# Altium PCB PlacaCircuito.PcbDoc (part 2 of 2)
Units mm, origin at the board's own origin, x right, y up, seen from the top; angles counter-clockwise.
Board outline 210.01 x 194.46 mm, 2 copper layers (Top Layer, Bottom Layer); 53 components, 91 nets, 338 pads, 161 vias.
Unrouted connection lines stored in the file: 2.
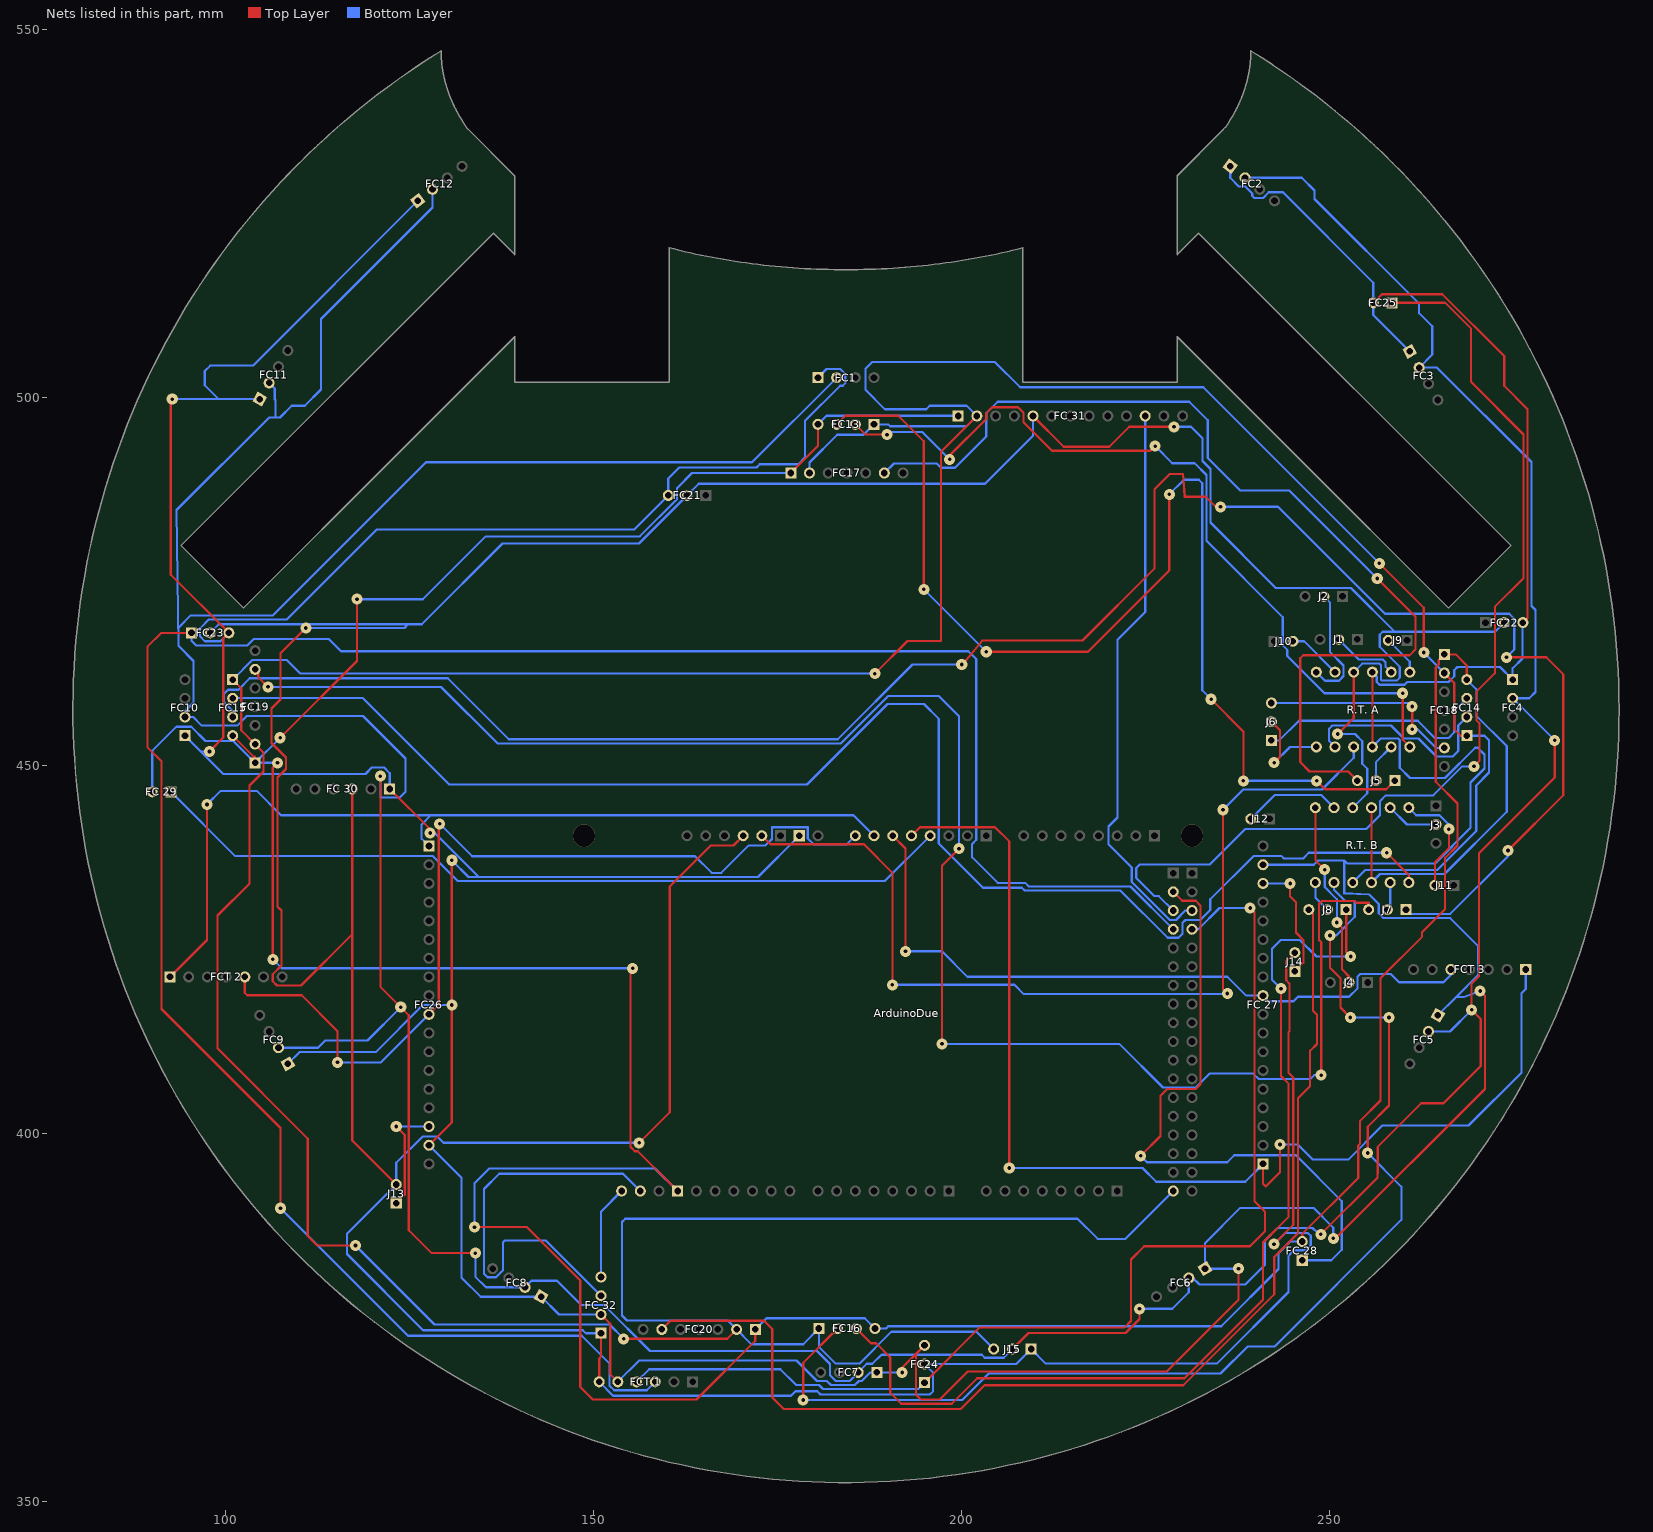
[diagram p2: the nets of this part, all layers, seen from the top]

## Via types
v1: diameter 1.5, hole 0.5, Top Layer to Bottom Layer, 157 vias
v2: diameter 3, hole 3, Top Layer to Bottom Layer, 4 vias

## Nets (pads, with @x,y where several pads share a name; then routed paths per layer and width w, separated by ;. In a path a pad name is that pad's centre, name@x,y a point inside that pad or via, vN(x,y) a via of type N, cw(c..) or ccw(c..) an arc to the next point about the centre after c; other vN are vias at no path point) (continued)
NetArduinoDue_48: "FCT 1.3" ArduinoDue.48 FC23.1 | length 321.8
  Top Layer w0.3: FC23.1@95.377,467.995 91.288,467.995 89.383,466.09 89.383,452.45 91.288,450.545 91.288,416.916 107.467,400.736 v1(107.467,389.839)
  Bottom Layer w0.3: FC23.1@95.377,467.995 95.377,466.928 96.037,466.268 102.946,466.268 103.835,467.157 114.021,467.157 115.672,465.506 200.889,465.506 201.955,464.439 201.955,439.874 201.411,439.329 201.411,437.515 204.891,434.035 208.614,434.035 209.107,433.542 222.921,433.542 ArduinoDue.48@228.727,427.736 ; v1(107.467,389.839) 124.79,372.516 148.387,372.516 152.135,368.768 152.135,365.76 152.781,365.114 157.215,365.114 158.369,366.268
NetArduinoDue_49: "FCT 1.4" ArduinoDue.49 FC24.1 | length 154.8
  Top Layer w0.3: FC24.1@194.945,366.141 202.463,373.659 222.123,373.659 222.987,374.523 222.987,382.88 224.79,384.683 239.166,384.683 241.198,386.715 241.198,389.357 239.751,390.804 239.751,430.047 v1(239.166,430.632)
  Bottom Layer w0.3: 155.829,366.268 157.537,367.976 175.355,367.976 177.501,365.83 180.613,365.83 181.167,365.276 194.08,365.276 FC24.1@194.945,366.141 ; ArduinoDue.49@231.267,427.736 232.105,427.736 235.001,430.632 v1(239.166,430.632)
NetArduinoDue_50: ArduinoDue.50 FC25.1 | length 138.7
  Top Layer w0.3: FC25.1@258.445,512.826 265.659,512.826 269.189,509.295 269.189,502.056 276.301,494.944 276.301,475.412 272.415,471.526 272.415,462.513 269.9,459.998 269.9,456.133 270.332,455.701 270.332,450.619 v1(269.573,449.859)
  Bottom Layer w0.3: ArduinoDue.50@228.727,430.276 226.769,432.234 226.169,432.234 223.698,434.705 223.698,436.053 224.169,436.524 233.68,436.524 238.506,441.35 254.94,441.35 256.819,443.23 256.819,445.135 257.607,445.922 264.061,445.922 267.998,449.859 v1(269.573,449.859)
NetArduinoDue_51: "FC 31.11" ArduinoDue.51 | length 77.5
  Bottom Layer w0.3: 224.917,497.459 224.917,470.814 221.158,467.055 221.158,442.925 219.939,441.706 219.939,439.282 223.088,436.132 223.088,434.158 228.24,429.006 229.089,429.006 230.359,430.276 ArduinoDue.51@231.267,430.276
NetArduinoDue_52: "FC 28.1" ArduinoDue.52 | length 87.3
  Top Layer w0.3: v1(224.307,396.951) 227,399.644 227,405.13 227.914,406.044 231.775,406.044 232.435,406.705 232.435,430.936 231.775,431.597 229.946,431.597 ArduinoDue.52@228.727,432.816
  Bottom Layer w0.3: v1(224.307,396.951) 225.171,396.088 236.068,396.088 237.007,397.027 245.389,397.027 251.623,390.793 251.623,384.211 250.19,382.778 246.253,382.778
NetArduinoDue_55: "FC 30.3" "FC 31.5" "FC 32.1" "FCT 1.6" "R.T. A.9" "R.T. B.9" ArduinoDue.55 FC21.2 FC22.2 FC23.2 FC24.2 J13.2 J14.2 J15.1 | length 696.4
  Top Layer w0.3: v1(110.913,468.655) 107.475,465.218 107.475,458.946 106.248,457.72 106.248,453.034 108.215,451.068 108.215,449.502 107.061,448.348 107.061,430.809 107.594,430.276 107.594,422.808 106.426,421.64 106.426,420.662 106.998,420.091 110.236,420.091 117.221,427.076 ; 117.221,446.786 117.221,427.076 ; J13.2@123.19,393.065 117.221,399.034 117.221,427.076 ; 150.749,366.268 150.749,369.443 151.003,369.697 151.003,372.872 ; v1(156.185,398.729) 160.325,402.869 160.325,433.553 165.887,439.115 168.986,439.115 ArduinoDue.55@170.307,440.436 ; 209.677,497.459 213.854,493.282 220.042,493.282 222.745,495.986 v1(228.829,495.986) ; v1(242.418,384.962) 245.034,387.579 245.034,407.594 244.373,408.254 244.373,413.741 244.526,413.893 244.526,420.345 244.069,420.802 244.069,423.393 J14.2@245.237,424.561 ; v1(251.054,454.254) 253.238,456.438 253.238,462.661
  Bottom Layer w0.3: FC23.2@97.917,467.995 99.085,469.163 124.816,469.163 ; v1(110.913,468.655) 124.308,468.655 124.816,469.163 ; 150.749,366.268 152.636,364.381 176.818,364.381 177.41,364.973 180.362,364.973 180.803,364.532 195.647,364.532 196.113,364.998 196.113,367.513 FC24.2@194.945,368.681 207.391,368.681 J15.1@209.423,370.713 211.404,368.732 234.645,368.732 244.373,378.46 244.373,383.388 245.11,384.124 246.721,384.124 247.407,384.81 247.407,386.094 247.015,386.486 243.942,386.486 v1(242.418,384.962) ; 151.003,372.872 148.946,372.872 148.539,373.278 126.822,373.278 116.484,383.616 116.484,386.359 J13.2@123.19,393.065 123.19,396.011 126.746,399.567 128.778,399.567 129.616,398.729 v1(156.185,398.729) ; 209.677,497.459 209.677,494.765 203.151,488.239 164.262,488.239 FC21.2@162.687,486.664 156.159,480.136 137.617,480.136 126.644,469.163 124.816,469.163 ; v1(228.829,495.986) 231.14,495.986 232.689,494.436 232.689,491.338 233.788,490.239 233.788,482.975 242.661,474.102 252.868,474.102 258.823,468.147 ; v1(251.054,454.254) 253.401,454.254 254.392,453.263 254.392,450.215 255.067,449.54 255.067,446.202 253.111,444.246 ; 253.238,462.661 254.392,463.815 256.743,463.815 256.946,463.612 256.946,461.62 257.059,461.507 259.08,461.507 259.486,461.913 259.486,463.372 256.769,466.09 256.769,467.741 257.175,468.147 258.823,468.147 ; FC22.2@273.685,469.392 272.44,468.147 258.823,468.147
  other v1: 148.717,440.436 231.267,440.436
  other v2: 148.717,440.436 231.267,440.436
NetArduinoDue_56: "R.T. A.3" ArduinoDue.56 | length 128.4
  Top Layer w0.3: ArduinoDue.56@172.847,440.436 174.015,439.268 186.715,439.268 190.576,435.407 v1(190.576,420.192) ; v1(235.483,443.967) 235.483,419.583 v1(236.068,418.998)
  Bottom Layer w0.3: v1(190.576,420.192) 207.162,420.192 208.432,418.922 235.991,418.922 v1(236.068,418.998) ; v1(235.483,443.967) 238.244,446.728 248.945,446.728 253.238,451.02 253.238,452.501
NetArduinoDue_58: "FC 27.17" "FC 30.1" "FC 32.2" "FCT 1.5" "R.T. A.2" "R.T. A.8" ArduinoDue.58 FC1.1 FC2.1 FC3.1 FC4.1 FC5.1 FC6.1 FC7.1 FC8.1 FC9.1 FC10.1 FC11.1 FC12.1 FC21.3 FC22.3 FC23.3 FC24.3 FC25.2 FC26.17 | length 869.8
  Top Layer w0.3: v1(92.761,499.745) 92.558,499.542 92.558,475.894 FC23.3@100.457,467.995 99.695,467.233 99.695,453.771 v1(97.815,451.891) ; 122.301,446.786 127.787,441.3 v1(127.787,440.817) ; FC26.17@127.635,398.399 130.734,401.498 v1(130.734,417.449) v1(130.734,437.109) ; 151.003,375.412 152.248,374.167 152.248,367.309 153.289,366.268 ; v1(191.897,367.538) 191.897,368.173 193.777,370.053 ; FC24.3@194.945,371.221 193.777,370.053 ; v1(237.591,381.635) 237.591,377.418 227.838,367.665 200.812,367.665 197.002,363.855 194.412,363.855 193.777,364.49 193.777,370.053 ; v1(250.469,385.75) 250.774,385.75 271.069,406.044 271.069,418.694 v1(270.408,419.354) ; 255.778,452.501 255.778,462.661 ; FC25.2@255.905,512.826 257.073,513.994 265.278,513.994 273.685,505.587 273.685,501.548 276.86,498.373 276.86,470.027 FC22.3@276.225,469.392
  Bottom Layer w0.3: v1(92.761,499.745) 99.06,499.745 ; FC10.1@94.488,454.025 96.622,451.891 ; v1(97.815,451.891) 96.622,451.891 ; FC23.3@100.457,467.995 99.303,466.841 97.191,466.841 96.545,467.487 96.545,468.63 97.733,469.818 108.3,469.818 120.523,482.041 155.524,482.041 FC21.3@160.147,486.664 160.147,488.95 161.646,490.449 172.11,490.449 172.568,490.906 177.8,490.906 178.714,491.82 178.714,496.799 183.49,501.574 183.832,501.574 184.175,501.917 184.175,503.174 183.515,503.834 181.635,503.834 FC1.1@180.467,502.666 ; FC11.1@104.648,499.745 99.06,499.745 ; FC9.1@108.458,409.448 110.058,411.048 120.397,411.048 126.798,417.449 v1(130.734,417.449) ; 122.301,446.786 122.301,448.945 121.552,449.694 119.877,449.694 119.001,448.818 99.695,448.818 96.622,451.891 ; FC12.1@126.111,526.669 103.734,504.292 97.917,504.292 97.18,503.555 97.18,501.625 99.06,499.745 ; FC26.17@127.635,398.399 132.055,393.979 132.055,380.416 134.645,377.825 FC8.1@142.875,377.825 145.288,375.412 151.003,375.412 ; v1(127.787,440.817) 128.422,440.817 134.398,434.842 ; v1(130.734,437.109) 133.001,434.842 134.398,434.842 ; 153.289,366.268 156.185,369.164 177.56,369.164 180.34,366.384 181.68,366.384 182.234,365.83 185.479,365.83 186.033,366.384 186.406,366.384 187.56,367.538 FC7.1@188.468,367.538 v1(191.897,367.538) ; ArduinoDue.58@177.927,440.436 172.333,434.842 134.398,434.842 ; FC2.1@236.474,531.368 236.474,529.793 237.642,528.625 238.506,528.625 239.446,527.685 239.446,527.355 239.725,527.075 240.944,527.075 241.706,527.837 243.637,527.837 255.905,515.569 FC25.2@255.905,512.826 255.905,511.175 FC3.1@260.858,506.222 ; v1(237.591,381.635) FC6.1@233.045,381.635 233.045,385.089 237.846,389.89 247.777,389.89 250.469,387.198 v1(250.469,385.75) ; 240.919,436.499 247.828,436.499 248.336,437.007 ; 255.778,452.501 256.932,453.655 259.283,453.655 259.486,453.452 259.486,449.682 260.888,448.28 265.635,448.28 269.754,452.399 270.089,452.399 271.004,451.485 271.004,449.58 269.101,447.677 269.101,441.507 264.271,436.677 252.349,436.677 251.943,437.083 ; 255.778,462.661 256.371,462.068 256.371,461.327 256.745,460.953 260.142,460.953 260.504,461.315 266.116,461.315 266.897,462.096 266.897,462.915 267.335,463.353 273.12,463.353 FC4.1@274.828,461.645 274.828,463.178 276.156,464.507 276.156,469.323 FC22.3@276.225,469.392 ; FC5.1@264.668,416.052 267.151,418.535 ; v1(270.408,419.354) 268.236,418.535 267.151,418.535 ; 248.336,437.007 251.943,437.083 ; 248.336,437.007 248.336,437.083 251.943,437.083 ; 251.943,437.083 251.943,432.613 255.361,432.445 256.642,431.165 256.642,429.895 257.288,429.249 266.344,429.249 270.154,425.439 270.154,421.538 267.151,418.535
NetArduinoDue_60: "FCT 2.5" ArduinoDue.60 FC26.10 | length 127.8
  Top Layer w0.3: 102.616,421.259 102.616,419.1 102.946,418.77 110.338,418.77 115.214,413.893 v1(115.214,409.651) ; FC26.10@127.635,416.179 128.956,417.5 128.956,441.935 v1(129.083,442.062)
  Bottom Layer w0.3: v1(115.214,409.651) 121.107,409.651 FC26.10@127.635,416.179 ; v1(129.083,442.062) 133.502,437.642 163.779,437.642 166.025,435.396 167.35,435.396 171.083,439.13 173.355,439.13 174.233,440.008 174.233,441.59 179.095,441.59 179.095,440.055 179.883,439.268 184.379,439.268 ArduinoDue.60@185.547,440.436
NetArduinoDue_61: "FCT 2.1" ArduinoDue.61 FC26.1 | length 124.5
  Top Layer w0.3: 92.456,421.259 97.485,426.288 v1(97.485,444.678)
  Bottom Layer w0.3: v1(97.485,444.678) 99.339,446.532 104.242,446.532 107.544,443.23 127.892,443.23 ; FC26.1@127.635,439.039 126.633,440.041 126.633,441.971 127.892,443.23 ; ArduinoDue.61@188.087,440.436 185.293,443.23 127.892,443.23
NetArduinoDue_62: "FC 27.10" "FCT 3.5" ArduinoDue.62 | length 97.4
  Top Layer w0.3: ArduinoDue.62@190.627,440.436 192.354,438.709 v1(192.354,424.739)
  Bottom Layer w0.3: v1(192.354,424.739) 197.307,424.739 200.762,421.284 236.079,421.284 238.645,418.719 240.919,418.719 241.687,417.951 245.065,417.951 245.674,418.559 252.595,418.559 253.771,419.735 253.771,421.322 254.114,421.665 258.267,421.665 259.385,420.548 265.43,420.548 266.446,421.564 266.446,422.275
NetArduinoDue_63: "FC 27.1" "FCT 3.1" ArduinoDue.63 | length 157.7
  Top Layer w0.3: ArduinoDue.63@193.167,440.436 194.335,441.604 204.521,441.604 206.451,439.674 v1(206.451,395.3) ; 240.919,395.859 240.919,393.167 241.3,392.786 243.23,394.716 v1(243.23,398.501)
  Bottom Layer w0.3: v1(206.451,395.3) 224.561,395.3 226.416,393.446 238.506,393.446 240.919,395.859 ; v1(243.23,398.501) 245.643,398.501 247.701,396.443 252.501,396.443 257.124,401.066 268.834,401.066 276.022,408.254 276.022,419.049 276.606,419.633 276.606,422.275
NetArduinoDue_64: "FC 29.1" ArduinoDue.64 | length 110.7
  Bottom Layer w0.3: 92.583,446.405 101.321,437.667 128.168,437.667 131.548,434.288 189.559,434.288 ArduinoDue.64@195.707,440.436
NetArduinoDue_76: "FC 28.2" "FC 29.2" "FC 31.1" "R.T. B.2" "R.T. B.8" ArduinoDue.76 FC13.4 FC14.4 FC15.4 FC16.4 FC17.1 FC18.1 FC19.1 FC20.1 | length 590.2
  Top Layer w0.3: FC15.4@100.965,454.025 103.835,451.155 104.013,451.155 FC19.1@104.013,450.342 ; v1(106.426,423.647) 106.426,449.707 v1(107.061,450.342) ; v1(107.417,453.746) 117.856,464.185 v1(117.856,472.567) ; v1(133.807,387.274) 140.945,387.274 148.184,380.035 148.184,365.557 149.885,363.855 163.982,363.855 171.958,371.831 FC20.1@171.958,373.38 ; v1(155.296,422.427) 155.016,422.148 155.016,398.145 155.575,397.586 156.007,397.586 ArduinoDue.76@161.417,392.176 ; FC17.1@176.784,489.712 180.467,493.395 FC13.4@180.467,496.316 ; 246.253,385.318 246.253,386.359 253.848,393.954 253.848,398.348 254.076,398.577 254.076,401.661 256.885,404.47 256.885,421.07 262.534,426.72 262.534,427.355 265.659,430.479 265.659,437.443 267.335,439.119 267.335,444.805 264.389,447.751 264.389,463.296 264.795,463.702 264.795,464.312 FC18.1@265.557,465.074 267.081,465.074 268.605,463.55 FC14.4@268.605,461.645 ; 255.651,434.086 255.651,444.246
  Bottom Layer w0.3: 90.043,446.405 90.043,451.968 93.32,455.244 95.352,455.244 97.282,453.313 101.042,453.313 FC19.1@104.013,450.342 ; v1(106.426,423.647) 107.645,422.427 v1(155.296,422.427) ; v1(107.061,450.342) FC19.1@104.013,450.342 ; v1(107.417,453.746) FC19.1@104.013,450.342 ; v1(117.856,472.567) 126.797,472.567 135.331,481.101 156.261,481.101 161.341,486.181 161.341,487.68 163.373,489.712 FC17.1@176.784,489.712 ; v1(133.807,387.274) 133.807,393.217 135.839,395.249 158.344,395.249 ArduinoDue.76@161.417,392.176 ; FC20.1@171.958,373.38 173.482,374.904 186.817,374.904 FC16.4@188.214,373.507 189.713,373.507 190.017,373.812 235.255,373.812 243.027,381.584 243.027,383.769 244.577,385.318 246.253,385.318 ; FC13.4@180.467,496.316 181.635,497.484 199.517,497.484 199.517,497.459 ; 255.651,434.086 256.805,435.24 265.568,435.24 274.015,443.687 274.015,452.628 269.9,456.743 269.9,460.35 FC14.4@268.605,461.645
NetArduinoDue_81: "FC 31.2" "R.T. B.3" ArduinoDue.81 FC13.1 FC14.1 FC15.1 FC16.1 FC17.2 FC18.2 FC19.2 FC20.2 J15.3 | length 626
  Top Layer w0.3: FC15.1@100.965,461.645 102.133,460.477 102.133,454.762 FC19.2@104.013,452.882 105.167,451.728 105.167,449.174 103.251,447.258 103.251,433.934 98.908,429.59 98.908,411.556 111.176,399.288 111.176,386.08 112.471,384.785 v1(117.653,384.785) ; v1(154.076,372.11) 168.148,372.11 FC20.2@169.418,373.38 ; v1(188.189,462.458) 192.634,466.903 197.187,466.903 197.187,492.589 202.057,497.459 ; v1(256.718,477.444) 262.763,471.399 v1(262.763,465.328) ; FC18.2@265.557,462.534 266.897,461.194 266.897,454.899 267.771,454.025 FC14.1@268.605,454.025
  Bottom Layer w0.3: FC15.1@100.965,461.645 103.632,464.312 108.331,464.312 110.185,462.458 v1(188.189,462.458) ; v1(117.653,384.785) 128.397,374.04 152.146,374.04 v1(154.076,372.11) ; FC17.2@179.324,489.712 179.324,491.134 183.083,494.894 186.665,494.894 FC13.1@188.087,496.316 190.017,496.316 190.271,496.062 200.66,496.062 202.057,497.459 200.66,498.856 195.656,498.856 195.174,498.373 189.56,498.373 186.919,501.015 186.919,503.86 187.858,504.8 204.495,504.8 207.942,501.353 232.808,501.353 v1(256.718,477.444) ; J15.3@204.343,370.713 202.006,373.05 190.439,373.05 186.121,368.732 182.88,368.732 180.594,371.018 FC16.1@180.594,373.507 178.46,371.373 171.425,371.373 FC20.2@169.418,373.38 168.199,374.599 154.534,374.599 153.848,375.285 153.848,387.985 154.28,388.417 215.729,388.417 218.464,385.682 222.233,385.682 ArduinoDue.81@228.727,392.176 ; 253.111,434.086 254.819,435.794 264.598,435.794 269.876,441.072 269.876,447.269 271.628,449.021 271.628,453.39 270.993,454.025 FC14.1@268.605,454.025 ; v1(262.763,465.328) FC18.2@265.557,462.534
NetArduinoDue_82: "FC 32.3" ArduinoDue.82 | length 58.1
  Bottom Layer w0.3: 151.003,377.952 143.51,385.445 137.922,385.445 137.668,385.191 137.668,381.395 136.74,380.467 135.572,380.467 135.103,380.936 135.103,392.455 137.16,394.513 154,394.513 ArduinoDue.82@156.337,392.176
NetArduinoDue_83: "FC 32.4" ArduinoDue.83 | length 12.8
  Bottom Layer w0.3: 151.003,380.492 151.003,389.382 ArduinoDue.83@153.797,392.176
NetFC1_2: FC1.2 FC2.2 FC3.2 FC4.2 FC5.2 FC6.2 FC7.2 FC8.2 FC9.2 FC10.2 FC11.2 FC12.2 J15.2 | length 672.2
  Top Layer w0.3: v1(121.031,448.539) 121.031,419.913 v1(123.8,417.144) 124.898,416.046 124.898,386.861 128.016,383.743 v1(133.934,383.743) ; J15.2@206.883,370.713 209.067,372.897 222.25,372.897 224.155,374.802 v1(224.155,376.174) ; v1(248.781,386.297) 256.489,394.005 256.489,394.566 256.492,394.568 256.492,398.173 262.407,404.089 265.354,404.089 265.43,404.089 270.51,409.169 270.51,415.544 v1(269.265,416.789) ; v1@269.24,416.585 269.24,420.319 270.256,421.335 270.256,438.074 280.543,448.361 v1(280.543,453.39)
  Bottom Layer w0.3: FC11.2@105.918,501.945 106.69,501.173 106.69,499.735 106.797,499.628 106.797,497.266 106.807,497.256 107.406,497.256 ; FC9.2@107.188,411.648 112.563,411.648 113.538,412.623 119.278,412.623 v1(123.8,417.144) ; v1(121.031,448.539) 121.031,445.618 123.647,445.618 124.435,446.405 124.435,450.926 118.669,456.692 102.895,456.692 101.6,455.397 96.774,455.397 95.606,456.565 FC10.2@94.488,456.565 94.488,457.378 95.656,458.546 95.656,464.185 93.624,466.217 ; FC12.2@128.113,528.233 128.113,525.78 112.954,510.621 112.954,501.04 110.769,498.856 109.007,498.856 107.406,497.256 ; v1(133.934,383.743) 133.934,380.543 135.382,379.095 FC8.2@140.675,379.095 141.564,379.984 145.034,379.984 148.336,376.682 151.435,376.682 157.658,370.459 180.34,370.459 182.118,368.681 182.118,367.146 182.88,366.384 184.774,366.384 FC7.2@185.928,367.538 187.096,368.706 187.858,368.706 189.103,369.951 202.717,369.951 203.124,369.545 205.715,369.545 J15.2@206.883,370.713 ; FC1.2@183.007,502.666 171.501,491.16 127.229,491.16 106.441,470.372 95.265,470.372 93.624,468.732 93.624,466.217 ; v1(224.155,376.174) 228.6,376.174 230.845,378.419 FC6.2@230.845,380.365 231.394,380.365 232.283,379.476 238.506,379.476 241.198,382.168 241.198,385.445 242.871,387.117 247.654,387.166 v1@248.22,386.6 ; FC2.2@238.476,529.804 246.191,529.804 247.904,528.091 247.904,526.923 262.128,512.699 262.128,511.406 263.906,509.628 263.906,505.8 FC3.2@262.128,504.022 264.566,504.022 277.393,491.195 277.393,471.64 277.933,471.1 277.933,459.949 277.089,459.105 FC4.2@274.828,459.105 v1(280.543,453.39) ; FC5.2@263.398,413.852 266.329,413.852 v1(269.265,416.789) ; 93.624,466.217 93.345,484.683 105.918,497.256 107.406,497.256
NetFC13_2: "R.T. A.0" FC13.2 | length 113.3
  Top Layer w0.3: FC13.2@185.547,496.316 186.944,494.919 v1(189.84,494.919) ; v1(198.349,491.566) 198.349,492.074 203.327,497.053 203.327,497.84 204.114,498.627 207.645,498.627 208.407,497.865 208.407,496.57 212.249,492.728 225.634,492.728 v1(226.269,493.363) ; v1(259.893,459.791) 259.893,453.466 260.858,452.501
  Bottom Layer w0.3: v1(189.84,494.919) 190.195,495.275 194.64,495.275 v1(198.349,491.566) ; v1(226.269,493.363) 228.6,491.033 231.631,491.033 233.234,489.43 233.234,480.51 243.611,470.133 243.611,466.293 244.221,465.684 244.221,464.845 249.276,459.791 v1(259.893,459.791)
NetFC13_3: FC13.3 J5.1 | length 155.4
  Top Layer w0.3: FC13.3@183.007,496.316 184.175,497.484 191.389,497.484 194.843,494.03 v1(194.843,473.913) ; v1(203.327,465.43) 217.145,465.43 228.194,476.479 v1(228.194,486.816) ; v1(233.883,458.978) 238.252,454.609 v1(238.252,447.904) ; v1(248.209,447.904) 249.352,446.761 257.658,446.761 J5.1@258.826,447.929
  Bottom Layer w0.3: v1(194.843,473.913) v1(203.327,465.43) ; v1(228.194,486.816) 230.175,488.798 232.181,488.798 232.664,488.315 232.664,460.197 v1(233.883,458.978) ; v1(238.252,447.904) v1(248.209,447.904)
NetFC14_2: "R.T. A.4" FC14.2 | length 27.7
  Bottom Layer w0.3: 250.698,452.501 249.9,453.299 249.9,454.977 250.33,455.408 258.318,455.408 260.071,453.655 262.026,453.655 264.476,451.206 266.7,451.206 267.451,451.957 267.451,455.411 FC14.2@268.605,456.565
NetFC14_3: FC14.3 J6.1 | length 32.5
  Bottom Layer w0.3: J6.1@242.062,453.39 243.142,453.39 245.795,456.043 261.931,456.043 264.253,453.72 266.141,453.72 266.897,454.476 266.897,457.397 FC14.3@268.605,459.105
NetFC15_2: "R.T. B.0" FC15.2 | length 201.3
  Top Layer w0.3: v1(257.708,438.125) 260.731,435.102 260.731,434.086
  Bottom Layer w0.3: FC15.2@100.965,459.105 100.99,459.13 118.669,459.13 130.404,447.396 178.994,447.396 189.916,458.318 194.869,458.318 196.875,456.311 196.875,439.395 202.895,433.375 208.166,433.375 208.553,432.988 221.545,432.988 227.965,426.568 229.438,426.568 229.997,427.126 229.997,428.625 230.378,429.006 232.41,429.006 233.751,430.347 233.751,431.8 239.619,437.667 243.448,437.667 243.764,437.352 246.369,437.352 247.142,438.125 v1(257.708,438.125)
NetFC15_3: FC15.3 J7.1 | length 273.8
  Top Layer w0.3: v1(200,463.702) 200.635,464.337 202.787,466.947 216.389,466.947 226.162,476.72 226.162,487.477 228.27,489.585 230.048,489.585 230.291,486.475 233.158,486.475 234.518,485.115 v1(235.153,485.115) ; v1(273.99,464.668) 279.4,464.668 281.711,462.356 281.711,445.948 v1(274.193,438.429)
  Bottom Layer w0.3: FC15.3@100.965,456.565 100.965,457.378 99.797,458.546 99.797,459.74 100.33,460.273 101.752,460.273 103.295,461.816 130.182,461.816 138.455,453.542 183.159,453.542 193.319,463.702 v1(200,463.702) ; v1(235.153,485.115) 242.963,485.115 257.492,470.586 274.371,470.586 275.057,469.9 275.057,465.734 v1(273.99,464.668) ; J7.1@260.35,430.403 260.927,429.826 266.355,429.826 274.193,437.664 v1(274.193,438.429)
NetFC16_2: "R.T. B.4" FC16.2 | length 162.1
  Top Layer w0.3: v1(178.46,363.804) 178.46,368.833 FC16.2@183.134,373.507 ; v1(250.012,426.898) 250.012,422.514 251.435,421.092 251.435,417.093 v1(252.781,415.747) ; v1(255.143,397.332) 255.143,400.914 258.039,403.809 v1(258.039,415.747)
  Bottom Layer w0.3: v1(178.46,363.804) 200.076,363.804 203.657,367.386 235.153,367.386 238.811,371.043 242.468,371.043 259.715,388.29 259.715,392.76 v1(255.143,397.332) ; v1(250.012,426.898) 250.872,426.898 253.39,429.416 253.39,431.557 252.135,431.557 250.571,433.121 250.571,434.086 ; v1(252.781,415.747) v1(258.039,415.747)
NetFC16_3: FC16.3 J8.1 | length 136.9
  Top Layer w0.3: FC16.3@185.674,373.507 187.681,371.5 188.366,371.5 190.297,369.57 190.297,364.769 191.77,363.296 198.653,363.296 202.108,366.751 230.251,366.751 240.919,377.419 240.919,385.191 244.399,388.671 244.399,406.756 243.357,407.797 v1(243.357,419.659) ; J8.1@252.222,430.403 252.222,424.637 v1(252.832,424.028)
  Bottom Layer w0.3: v1(243.357,419.659) 242.138,420.878 242.138,425.098 243.328,426.288 245.925,426.288 248.186,424.028 v1(252.832,424.028)
NetFC17_6: FC17.6 J5.3 | length 137.1
  Top Layer w0.3: J5.3@253.746,447.929 252.502,449.173 247.245,449.173 245.974,450.444 245.974,464.541 246.38,464.947 260.833,464.947 261.645,465.76 261.645,470.179 v1(256.438,475.386)
  Bottom Layer w0.3: FC17.6@189.484,489.712 190.784,491.012 196.587,491.012 197.187,490.412 199.072,490.412 203.327,494.667 203.327,497.84 204.876,499.389 230.911,499.389 233.426,496.875 233.426,491.744 237.846,487.324 244.5,487.324 v1(256.438,475.386)
NetFC18_6: FC18.6 J6.3 | length 27.8
  Top Layer w0.3: v1(261.188,454.889) v1(261.188,457.987)
  Bottom Layer w0.3: J6.3@242.062,458.47 260.706,458.47 v1(261.188,457.987) ; v1(261.188,454.889) 261.911,454.889 264.426,452.374 FC18.6@265.557,452.374
NetFC19_6: FC19.6 J7.3 | length 236
  Top Layer w0.3: FC19.6@104.013,463.042 104.445,462.61 104.445,461.975 v1(105.766,460.654) ; v1(197.307,412.166) 197.307,436.372 v1(199.619,438.683) ; v1(248.82,407.924) 248.82,425.956 248.514,426.262 248.514,431.165 248.92,431.571 253.365,431.571 253.594,431.343 255.27,431.343 J7.3@255.27,430.403
  Bottom Layer w0.3: v1(105.766,460.654) 129.261,460.654 136.931,452.984 183.591,452.984 190.043,459.435 196.85,459.435 199.619,456.667 v1(199.619,438.683) ; v1(197.307,412.166) 221.412,412.166 227.33,406.248 231.775,406.248 233.655,408.127 239.611,408.127 240.347,407.391 247.345,407.391 247.879,407.924 v1(248.82,407.924)
NetFC20_6: FC20.6 J8.3 | length 155.6
  Top Layer w0.3: FC20.6@159.258,373.38 160.426,374.548 173.126,374.548 174.251,373.424 174.251,364.122 175.814,362.56 199.847,362.56 203.098,365.811 230.099,365.811 242.443,378.155 242.443,383.21 245.669,386.436 245.669,404.8 247.32,406.451 247.32,411.226 248.24,412.147 248.24,416.128 247.726,416.642 247.726,429.819 J8.3@247.142,430.403
NetFC26_16: FC26.16 J13.1 | length 15.8
  Top Layer w0.3: J13.1@123.19,390.525 124.344,391.679 124.344,399.785 v1(123.19,400.939)
  Bottom Layer w0.3: v1(123.19,400.939) FC26.16@127.635,400.939
"NetFC 27_16": "FC 27.16" J14.1 | length 16.9
  Top Layer w0.3: v1(244.602,433.959) 244.602,432.181 245.389,431.394 245.389,427.304 246.405,426.288 246.405,423.189 J14.1@245.237,422.021
  Bottom Layer w0.3: 240.919,433.959 v1(244.602,433.959)
NetJ1_2: "R.T. A.7" J1.2 | length 9.3
  Bottom Layer w0.3: J1.2@251.206,467.106 253.943,464.369 257.175,464.369 257.577,463.967 257.577,463.402 258.318,462.661
NetJ2_2: "R.T. A.11" J2.2 | length 16.4
  Bottom Layer w0.3: 248.158,462.661 249.326,461.493 251.231,461.493 251.866,462.128 251.866,463.55 250.038,465.379 250.038,472.084 J2.2@249.174,472.948
NetJ3_2: "R.T. B.7" J3.2 | length 7.2
  Bottom Layer w0.3: 258.191,444.246 260.477,441.96 J3.2@264.414,441.96
NetJ4_2: "R.T. B.11" J4.2 | length 25.6
  Top Layer w0.3: 248.031,444.246 248.031,437.109 v1(249.301,435.839) ; v1(250.952,428.65) 251.667,427.936 251.667,422.259 252.603,421.322 J4.2@252.603,420.497
  Bottom Layer w0.3: v1(249.301,435.839) 249.301,433.476 250.952,431.825 v1(250.952,428.65)
NetJ5_2: "R.T. A.1" J5.2 | length 5.4
  Bottom Layer w0.3: J5.2@256.286,447.929 256.286,450.469 258.318,452.501
NetJ6_2: "R.T. A.5" J6.2 | length 13
  Top Layer w0.3: J6.2@242.062,455.93 243.216,454.776 243.216,451.14 v1(242.443,450.367)
  Bottom Layer w0.3: v1(242.443,450.367) 244.577,452.501 248.158,452.501
NetJ7_2: "R.T. B.1" J7.2 | length 3.8
  Bottom Layer w0.3: J7.2@257.81,430.403 258.191,430.784 258.191,434.086
NetJ8_2: "R.T. B.5" J8.2 | length 4.4
  Bottom Layer w0.3: 248.031,434.086 248.031,432.054 J8.2@249.682,430.403
NetJ9_2: "R.T. A.6" J9.2 | length 5.5
  Bottom Layer w0.3: J9.2@257.937,466.979 260.858,464.058 260.858,462.661
NetJ10_2: "R.T. A.10" J10.2 | length 7.5
  Bottom Layer w0.3: J10.2@244.983,466.852 246.507,466.852 250.698,462.661
NetJ11_2: "R.T. B.6" J11.2 | length 15.4
  Top Layer w0.3: J11.2@264.287,433.705 264.287,436.855 266.167,438.734 v1(266.167,441.325)
  Bottom Layer w0.3: 260.731,444.246 261.747,443.23 264.897,443.23 266.167,441.96 v1(266.167,441.325)
NetJ12_2: "R.T. B.10" J12.2 | length 13.4
  Bottom Layer w0.3: J12.2@239.268,442.722 242.516,445.97 248.847,445.97 250.571,444.246
pads on no net: "FC 27.2" "FC 27.3" "FC 27.4" "FC 27.7" "FC 27.8" "FC 27.11" "FC 27.12" "FC 27.13" "FC 27.18" "FC 30.2" "FC 30.6" ArduinoDue.13 ArduinoDue.53 ArduinoDue.54 ArduinoDue.57 ArduinoDue.59 ArduinoDue.65 ArduinoDue.66 ArduinoDue.67 ArduinoDue.68 ArduinoDue.69 ArduinoDue.70 ArduinoDue.71 ArduinoDue.72 ArduinoDue.73 ArduinoDue.74 ArduinoDue.75 ArduinoDue.77 ArduinoDue.78 ArduinoDue.79 ArduinoDue.80 ArduinoDue.84 ArduinoDue.85 FC1.3 FC2.3 FC3.3 FC4.3 FC5.3 FC6.3 FC7.3 FC8.3 FC9.3 FC10.3 FC11.3 FC12.3 FC17.3 FC17.4 FC17.5 FC17.7 FC18.3 FC18.4 FC18.5 FC18.7 FC19.3 FC19.4 FC19.5 FC19.7 FC20.3 FC20.4 FC20.5 FC20.7 FC26.2 FC26.3 FC26.4 FC26.7 FC26.8 FC26.11 FC26.12 FC26.13 FC26.18
copper on no net: | length 4218.7
  Top Layer w0.006: 229.279,529.944 ccw(c229.276,529.944) 229.279,529.944 ; 229.279,529.944 ccw(c229.276,529.944) 229.279,529.944 ; 110.034,383.335 ccw(c110.031,383.335) 110.034,383.335 ; 110.034,531.827 ccw(c110.031,531.827) 110.034,531.827 ; 139.28,529.944 ccw(c139.277,529.944) 139.28,529.944 ; 139.281,529.944 ccw(c139.278,529.944) 139.281,529.944 ; 157.104,356.159 ccw(c157.101,356.159) 157.104,356.159 ; 160.281,520.296 ccw(c160.278,520.296) 160.281,520.296 ; 184.673,457.839 ccw(c184.67,457.839) 184.673,457.839 ; 208.279,520.296 ccw(c208.276,520.296) 208.279,520.296 ; 258.526,383.335 ccw(c258.523,383.335) 258.526,383.335 ; 258.526,531.827 ccw(c258.523,531.827) 258.526,531.827
  Top Layer w0.013: 82.277,453.771 82.277,457.581 82.277,461.391 ; 114.816,483.742 153,445.558 170.678,463.236 132.494,501.42 ; 126.337,440.276 126.337,394.556 154.277,394.556 154.277,440.276 ; 129.277,496.664 129.277,446.664 239.277,446.664 239.277,496.664 ; 139.277,489.164 139.277,454.164 229.277,454.164 229.277,489.164 ; 139.277,502.024 159.277,502.024 ; 161.839,454.397 123.655,492.581 ; 180.467,355.581 184.277,355.581 188.087,355.581 ; 180.467,501.618 188.087,501.618 ; 180.467,514.318 184.277,514.318 188.087,514.318 ; 206.715,454.397 244.899,492.581 ; 209.277,502.024 229.277,502.024 ; 214.277,394.556 214.277,440.276 ; 236.06,501.42 197.876,463.236 215.554,445.558 253.738,483.742 ; 239.277,547.024 cw(c184.277,457.581) 129.277,547.024 129.277,546.916 129.278,546.808 129.28,546.701 129.283,546.593 129.286,546.485 129.29,546.377 129.295,546.27 129.3,546.162 129.306,546.054 129.313,545.946 129.321,545.839 129.329,545.731 129.338,545.623 129.348,545.516 129.358,545.408 129.37,545.301 129.382,545.193 129.394,545.085 129.408,544.978 129.422,544.87 129.436,544.763 129.452,544.656 129.468,544.548 129.485,544.441 129.503,544.333 129.521,544.226 129.541,544.119 129.56,544.012 129.581,543.904 129.602,543.797 129.624,543.69 129.647,543.583 129.671,543.476 129.695,543.369 129.72,543.262 129.745,543.155 129.772,543.049 129.799,542.942 129.827,542.835 129.855,542.728 129.884,542.622 129.914,542.515 129.945,542.409 129.976,542.302 130.008,542.196 130.041,542.09 130.074,541.984 130.109,541.877 130.144,541.771 130.179,541.665 130.216,541.559 130.253,541.453 130.29,541.348 130.329,541.242 130.368,541.136 130.408,541.031 130.449,540.925 130.49,540.82 130.532,540.714 130.575,540.609 130.618,540.504 130.662,540.399 130.707,540.294 130.753,540.189 130.799,540.084 130.846,539.979 130.894,539.875 130.942,539.77 130.991,539.666 131.041,539.561 131.091,539.457 131.142,539.353 131.194,539.249 131.247,539.145 131.3,539.041 131.354,538.937 131.409,538.834 131.464,538.73 131.52,538.627 131.577,538.523 131.634,538.42 131.692,538.317 131.751,538.214 131.811,538.111 131.871,538.009 131.932,537.906 131.993,537.803 132.056,537.701 132.119,537.599 132.182,537.497 132.247,537.395 132.312,537.293 132.377,537.191 132.444,537.089 132.511,536.988 132.579,536.887 132.647,536.785 132.716,536.684 132.786,536.583 132.856,536.482 133.12,536.218 133.438,535.901 133.628,535.71 133.78,535.559 133.946,535.393 134.136,535.202 134.263,535.075 134.39,534.948 134.542,534.797 134.708,534.631 134.898,534.44 139.278,530.061 139.278,529.944 139.278,519.385 136.383,522.28 93.957,479.853 102.442,471.368 123.655,492.581 ; 239.277,547.032 239.277,546.924 239.276,546.816 239.274,546.708 239.271,546.6 239.268,546.492 239.264,546.385 239.26,546.277 239.254,546.169 239.248,546.061 239.241,545.953 239.234,545.846 239.225,545.738 239.216,545.63 239.207,545.523 239.196,545.415 239.185,545.307 239.173,545.2 239.161,545.092 239.147,544.984 239.133,544.877 239.118,544.769 239.103,544.662 239.087,544.554 239.07,544.447 239.052,544.339 239.034,544.232 239.014,544.125 238.995,544.017 238.974,543.91 238.953,543.803 238.931,543.696 238.908,543.588 238.885,543.481 238.86,543.374 238.835,543.267 238.81,543.16 238.784,543.054 238.757,542.947 238.729,542.84 238.7,542.733 238.671,542.626 238.641,542.52 238.611,542.413 238.579,542.307 238.547,542.2 238.514,542.094 238.481,541.988 238.447,541.881 238.412,541.775 238.376,541.669 238.34,541.563 238.303,541.457 238.265,541.351 238.226,541.245 238.187,541.14 238.147,541.034 238.107,540.928 238.065,540.823 238.023,540.717 237.981,540.612 237.937,540.507 237.893,540.402 237.848,540.297 237.803,540.192 237.756,540.087 237.709,539.982 237.662,539.877 237.613,539.773 237.564,539.668 237.514,539.564 237.464,539.459 237.413,539.355 237.361,539.251 237.308,539.147 237.255,539.043 237.201,538.939 237.146,538.835 237.091,538.732 237.035,538.628 236.978,538.525 236.92,538.422 236.862,538.319 236.803,538.215 236.744,538.113 236.684,538.01 236.623,537.907 236.561,537.804 236.499,537.702 236.436,537.6 236.372,537.497 236.308,537.395 236.243,537.293 236.177,537.192 236.11,537.09 236.043,536.988 235.976,536.887 235.907,536.786 235.838,536.684 235.331,536.177 235.331,536.146 235.125,535.94 234.847,535.662 232.019,532.834 231.823,532.638 231.545,532.36 231.291,532.106 231.061,531.876 230.846,531.662 230.632,531.447 229.276,530.091 229.276,529.944 229.276,519.385 232.171,522.28 274.597,479.853 266.112,471.368 244.899,492.581 ; 242.217,394.556 242.217,440.276 ; 273.577,453.771 273.577,461.391 ; 286.277,453.79 286.277,455.676 286.277,461.391 ; 123.655,492.581 139.278,508.204 139.278,502.024 160.278,502.024 160.278,520.296 160.901,520.135 161.632,519.953 162.367,519.777 163.108,519.607 163.853,519.442 164.602,519.284 165.356,519.131 166.114,518.985 166.875,518.844 167.641,518.71 168.409,518.581 169.182,518.459 169.957,518.343 170.736,518.233 171.517,518.129 172.301,518.031 173.088,517.94 173.877,517.854 174.669,517.775 175.462,517.702 176.258,517.636 177.055,517.576 177.853,517.522 178.653,517.474 179.454,517.433 180.256,517.398 181.06,517.369 181.863,517.347 182.668,517.331 183.472,517.322 184.277,517.318 185.082,517.322 185.886,517.331 186.691,517.347 187.494,517.369 188.298,517.398 189.1,517.433 189.901,517.474 190.701,517.522 191.499,517.576 192.296,517.636 193.092,517.702 193.885,517.775 194.677,517.854 195.466,517.94 196.253,518.031 197.037,518.129 197.818,518.233 198.597,518.343 199.372,518.459 200.145,518.581 200.913,518.71 201.679,518.844 202.44,518.985 203.198,519.131 203.952,519.284 204.701,519.442 205.446,519.607 206.187,519.777 206.923,519.953 207.55,520.108 208.276,520.296 208.276,502.024 229.276,502.024 229.276,508.204 244.899,492.581 ; 86.277,457.581 ccw(c84.777,457.581) 86.277,457.581 ; 89.184,431.699 ccw(c87.684,431.699) 89.184,431.699 ; 89.184,483.463 ccw(c87.684,483.463) 89.184,483.463 ; 89.412,472.19 ccw(c87.912,472.19) 89.412,472.19 ; 89.818,452.716 89.818,457.866 89.818,463.016 95.918,463.016 95.918,452.716 89.818,452.716 ; 96.543,493.307 ccw(c95.043,493.307) 96.543,493.307 ; 99.018,457.581 ccw(c97.518,457.581) 99.018,457.581 ; 99.937,414.897 102.512,410.437 105.087,405.976 110.37,409.026 105.22,417.947 99.937,414.897 ; 99.964,500.829 102.539,505.289 105.114,509.749 110.397,506.699 105.247,497.779 99.964,500.829 ; 102.822,444.597 ccw(c101.322,444.597) 102.822,444.597 ; 104.391,426.327 ccw(c102.891,426.327) 104.391,426.327 ; 109.435,518.461 ccw(c107.935,518.461) 109.435,518.461 ; 110.707,414.24 ccw(c109.207,414.24) 110.707,414.24 ; 110.707,501.438 ccw(c109.207,501.438) 110.707,501.438 ; 112.264,464.956 ccw(c110.764,464.956) 112.264,464.956 ; 114.851,399.491 ccw(c113.351,399.491) 114.851,399.491 ; 115.066,386.87 ccw(c113.566,386.87) 115.066,386.87 ; 115.066,528.292 ccw(c113.566,528.292) 115.066,528.292 ; 120.777,512.581 ccw(c119.277,512.581) 120.777,512.581 ; 122.129,529.617 125.858,524.79 134.01,531.086 130.281,535.913 126.205,532.765 122.129,529.617 ; 124.451,478.191 ccw(c122.701,478.191) 124.451,478.191 ; 125.777,512.818 ccw(c124.277,512.818) 125.777,512.818 ; 129.721,521.28 ccw(c128.383,521.28) 129.721,521.28 ; 130.777,387.556 ccw(c129.277,387.556) 130.777,387.556 ; 132.412,526.671 ccw(c130.912,526.671) 132.412,526.671 ; 132.76,378.283 137.22,375.708 141.68,373.133 144.73,378.416 135.81,383.566 132.76,378.283 ; 132.934,449.664 ccw(c131.434,449.664) 132.934,449.664 ; 132.934,493.664 ccw(c131.434,493.664) 132.934,493.664 ; 133.431,469.211 ccw(c131.681,469.211) 133.431,469.211 ; 133.517,389.556 133.517,442.856 184.277,442.856 235.037,442.856 235.037,389.556 133.517,389.556 ; 139.795,493.536 ccw(c138.045,493.536) 139.795,493.536 ; 142.411,382.469 ccw(c140.911,382.469) 142.411,382.469 ; 142.411,460.231 ccw(c140.661,460.231) 142.411,460.231 ; 143.919,430.18 ccw(c142.419,430.18) 143.919,430.18 ; 144.959,404.04 ccw(c143.459,404.04) 144.959,404.04 ; 146.353,368.84 ccw(c144.853,368.84) 146.353,368.84 ; 146.901,455.741 ccw(c145.151,455.741) 146.901,455.741 ; 148.775,484.555 ccw(c147.025,484.555) 148.775,484.555 ; 154.277,375.556 214.277,375.556 214.277,387.556 184.277,387.556 154.277,387.556 154.277,375.556 ; 157.755,475.575 ccw(c156.005,475.575) 157.755,475.575 ; 159.895,360.988 ccw(c158.395,360.988) 159.895,360.988 ; 162.245,471.085 ccw(c160.495,471.085) 162.245,471.085 ; 163.543,493.508 ccw(c162.043,493.508) 163.543,493.508 ; 166.368,510.565 ccw(c164.868,510.565) 166.368,510.565 ; 166.652,503.386 ccw(c165.152,503.386) 166.652,503.386 ; 171.777,467.318 196.777,467.318 196.777,512.318 171.777,512.318 171.777,467.318 ; 172.058,361.858 ccw(c170.558,361.858) 172.058,361.858 ; 175.177,397.056 ccw(c173.427,397.056) 175.177,397.056 ; 175.177,409.756 ccw(c173.427,409.756) 175.177,409.756 ; 175.177,422.456 ccw(c173.427,422.456) 175.177,422.456 ; 175.177,428.806 ccw(c173.427,428.806) 175.177,428.806 ; 175.868,512.818 ccw(c174.368,512.818) 175.868,512.818 ; 178.277,479.318 ccw(c176.777,479.318) 178.277,479.318 ; 178.277,486.318 ccw(c176.777,486.318) 178.277,486.318 ; 178.277,493.318 ccw(c176.777,493.318) 178.277,493.318 ; 178.277,500.318 ccw(c176.777,500.318) 178.277,500.318 ; 179.127,501.218 189.427,501.218 189.427,507.318 184.277,507.318 179.127,507.318 179.127,501.218 ; 179.493,362.987 184.643,362.987 189.793,362.987 189.793,369.087 179.493,369.087 179.493,362.987 ; 185.677,473.751 ccw(c184.177,473.751) 185.677,473.751 ; 185.677,482.532 ccw(c184.177,482.532) 185.677,482.532 ; 185.677,492.959 ccw(c184.177,492.959) 185.677,492.959 ; 185.777,358.081 ccw(c184.277,358.081) 185.777,358.081 ; 185.777,370.687 ccw(c184.277,370.687) 185.777,370.687 ; 185.777,499.618 ccw(c184.277,499.618) 185.777,499.618 ; 185.777,511.818 ccw(c184.277,511.818) 185.777,511.818 ; 193.277,479.318 ccw(c191.777,479.318) 193.277,479.318 ; 193.277,486.318 ccw(c191.777,486.318) 193.277,486.318 ; 193.277,493.318 ccw(c191.777,493.318) 193.277,493.318 ; 193.277,500.318 ccw(c191.777,500.318) 193.277,500.318 ; 195.686,512.818 ccw(c194.186,512.818) 195.686,512.818 ; 196.877,397.056 ccw(c195.127,397.056) 196.877,397.056 ; 196.877,409.756 ccw(c195.127,409.756) 196.877,409.756 ; 196.877,422.456 ccw(c195.127,422.456) 196.877,422.456 ; 196.877,428.806 ccw(c195.127,428.806) 196.877,428.806 ; 199.826,360.589 ccw(c198.326,360.589) 199.826,360.589 ; 204.702,502.654 ccw(c203.202,502.654) 204.702,502.654 ; 205.186,510.565 ccw(c203.686,510.565) 205.186,510.565 ; 206.531,492.959 ccw(c205.031,492.959) 206.531,492.959 ; 209.809,471.085 ccw(c208.059,471.085) 209.809,471.085 ; 211.659,360.988 ccw(c210.159,360.988) 211.659,360.988 ; 214.299,475.575 ccw(c212.549,475.575) 214.299,475.575 ; 219.965,370.77 ccw(c218.465,370.77) 219.965,370.77 ; 223.279,484.555 ccw(c221.529,484.555) 223.279,484.555 ; 224.563,378.389 233.483,383.539 236.533,378.256 232.073,375.681 227.613,373.106 224.563,378.389 ; 225.153,455.741 ccw(c223.403,455.741) 225.153,455.741 ; 226.055,401.812 ccw(c224.555,401.812) 226.055,401.812 ; 229.34,382.128 ccw(c227.84,382.128) 229.34,382.128 ; 229.643,460.231 ccw(c227.893,460.231) 229.643,460.231 ; 232.259,493.536 ccw(c230.509,493.536) 232.259,493.536 ; 234.544,531.086 238.273,535.913 242.349,532.765 246.425,529.617 242.696,524.79 234.544,531.086 ; 236.934,449.664 ccw(c235.434,449.664) 236.934,449.664 ; 236.934,493.664 ccw(c235.434,493.664) 236.934,493.664 ; 238.623,469.211 ccw(c236.873,469.211) 238.623,469.211 ; 239.142,526.671 ccw(c237.642,526.671) 239.142,526.671 ; 240.777,387.556 ccw(c239.277,387.556) 240.777,387.556 ; 241.671,521.28 ccw(c240.171,521.28) 241.671,521.28 ; 245.777,512.818 ccw(c244.277,512.818) 245.777,512.818 ; 246.425,432.586 262.475,432.586 262.475,445.916 246.425,445.916 246.425,432.586 ; 246.425,450.916 246.425,464.246 262.475,464.246 262.475,450.916 246.425,450.916 ; 247.603,478.191 ccw(c245.853,478.191) 247.603,478.191 ; 250.777,512.581 ccw(c249.277,512.581) 250.777,512.581 ; 252.618,413.716 ccw(c251.118,413.716) 252.618,413.716 ; 253.496,400.556 ccw(c249.996,400.556) 253.496,400.556 ; 256.488,386.87 ccw(c254.988,386.87) 256.488,386.87 ; 256.488,528.292 ccw(c254.988,528.292) 256.488,528.292 ; 258.943,408.98 264.093,417.9 269.376,414.85 266.801,410.39 264.226,405.93 258.943,408.98 ; 258.97,506.652 264.12,497.732 269.403,500.782 266.828,505.242 264.253,509.702 258.97,506.652 ; 259.028,426.022 ccw(c257.528,426.022) 259.028,426.022 ; 260.792,519.63 ccw(c259.292,519.63) 260.792,519.63 ; 261.659,414.286 ccw(c260.159,414.286) 261.659,414.286 ; 261.66,501.392 ccw(c260.16,501.392) 261.66,501.392 ; 261.98,398.893 ccw(c260.48,398.893) 261.98,398.893 ; 273.322,457.581 ccw(c271.822,457.581) 273.322,457.581 ; 273.422,452.662 273.422,462.962 279.522,462.962 279.522,457.812 279.522,452.662 273.422,452.662 ; 273.583,446.073 ccw(c272.083,446.073) 273.583,446.073 ; 275.533,491.661 ccw(c274.033,491.661) 275.533,491.661 ; 280.82,472.745 ccw(c279.32,472.745) 280.82,472.745 ; 282.37,431.699 ccw(c280.87,431.699) 282.37,431.699 ; 282.37,483.463 ccw(c280.87,483.463) 282.37,483.463 ; 285.345,457.708 ccw(c283.845,457.708) 285.345,457.708
  Top Layer w0.3: 150.394,439.42 149.506,438.532 147.928,438.532 146.813,439.647 146.813,441.225 147.928,442.34 149.506,442.34 150.621,441.225 150.621,439.647 150.495,439.521 ; 229.363,439.8 229.363,439.647 ; 229.363,439.647 230.478,438.532 232.03,438.532 232.056,438.532 233.171,439.647 233.171,439.675 233.171,441.225 232.282,442.114 232.282,442.34 230.478,442.34 229.363,441.225 229.363,439.647
  Bottom Layer w0.3: 149.987,441.859 150.621,441.225 150.621,439.647 149.506,438.532 147.928,438.532 146.813,439.647 146.813,441.225 147.928,442.34 147.954,442.34 147.955,442.341 149.505,442.341 150.571,441.274 ; 232.157,442.34 230.478,442.34 230.111,441.973 229.363,441.225 229.363,439.647 230.478,438.532 230.887,438.532 232.056,438.532 233.171,439.647 233.171,441.225 232.283,442.113 232.283,442.214
  other v2: 149.987,392.176 224.917,392.176

## Keep-outs
Keep-Out Layer:
  lines w0.3: 52.1,77.5 549.5,77.5 549.5,574.9 52.1,574.9 52.1,77.5

## Other copper
Top Layer:
  pour cut-out: 102.891,424.827 cw(c102.891,426.327) 101.391,426.327 cw(c102.891,426.327) 102.891,427.827 cw(c102.891,426.327) 104.391,426.327 cw(c102.891,426.327)
  text "THE FORCE ROBOTICS" at 162.687,448.818 h5